# Altium PCB Lane_Detection_using_Sobel_Filter_Layout_Draft.PcbDoc
Units mil, origin at the board's own origin, x right, y up, seen from the top; angles counter-clockwise.
Board outline 6000 x 4000 mil, 2 copper layers (Top Layer, Bottom Layer); 9 components, 54 nets, 417 pads, 0 vias.
Unrouted connection lines stored in the file: 170.
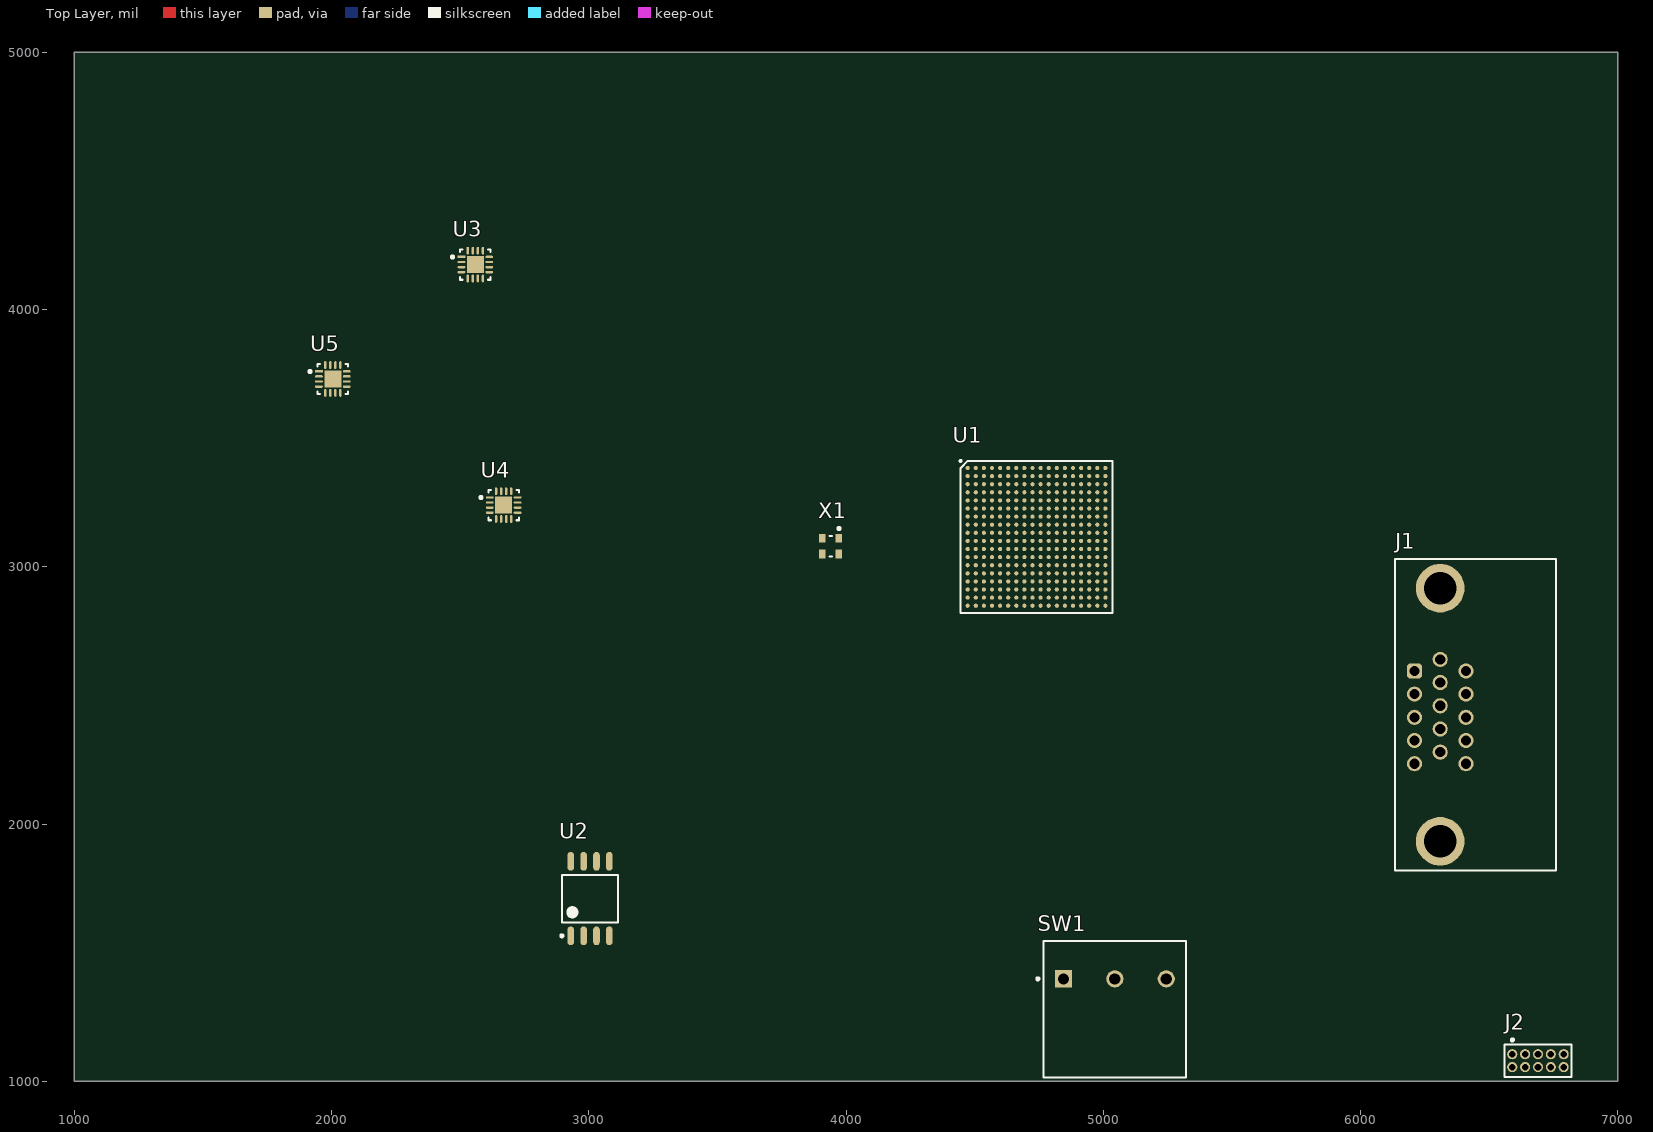
[diagram p0: Top Layer view]
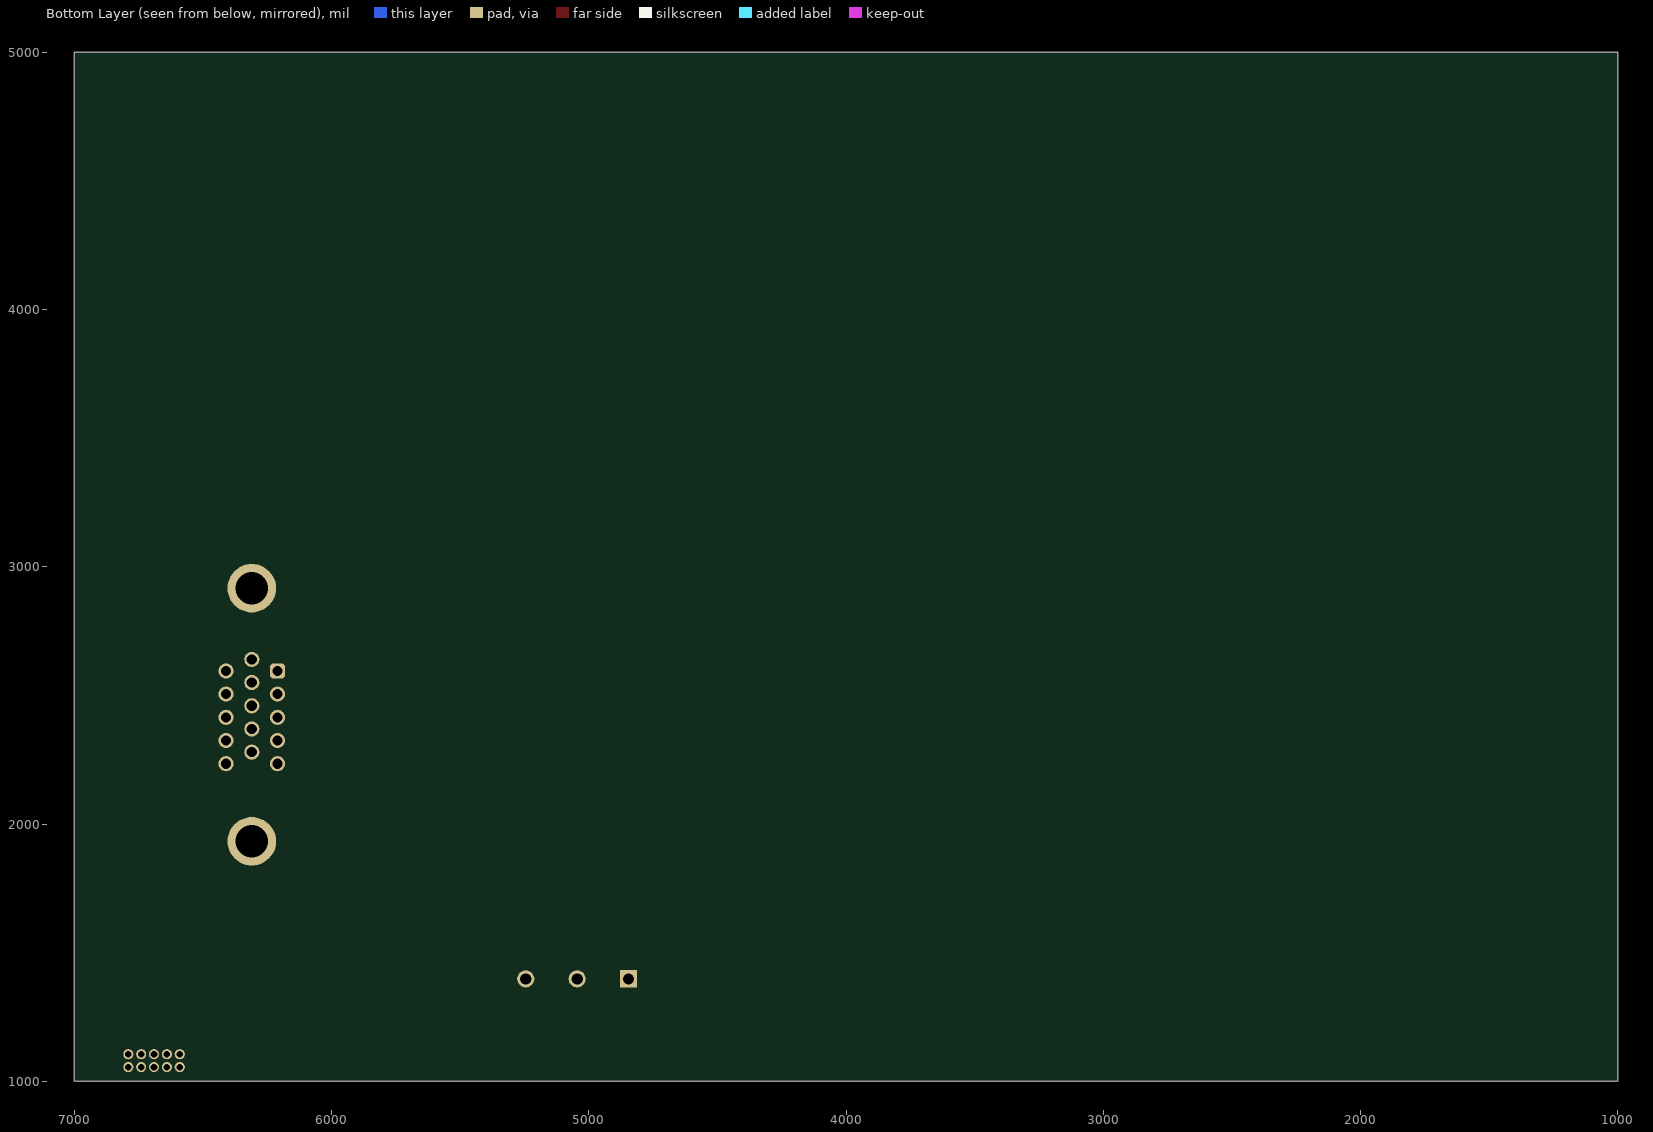
[diagram p1: Bottom Layer view, seen from below]

## Layer stack, top to bottom
Top Solder: solder mask 0.4, Solder Resist, Dk 3.5
Top Layer: signal copper 1.4
Dielectric 1: dielectric 12.6, FR-4, Dk 4.8
Bottom Layer: signal copper 1.4
Bottom Solder: solder mask 0.4, Solder Resist, Dk 3.5

## Board outline
1000,1000 7000,1000 7000,5000 1000,5000

## Design rules (kind name [scope] priority, off if disabled: settings)
Clearance [All] p1: gap=10 ignorepadtopadclearanceinfootprint=FALSE
PolygonConnect [All] p1: connectstyle=Relief reliefconductorwidth=10 reliefentries=4 polygonreliefangle="90 Angle" airgapwidth=10
RoutingVias [All] p1: holewidth=28 width=50 viastyle="Through Hole" minholewidth=28 minwidth=50 maxholewidth=28 maxwidth=50
SolderMaskExpansion [All] p1: expansion=4 istentingtop=FALSE
SupplyNets "Schematic Supply Nets" [InNet('GND')] p1: voltage=0.000
Width [All] p1: maxlimit=10 minlimit=10 preferedwidth=10
30 further rules are at their usual default settings.

## Components (designator, comment, footprint, x,y, rotation, side; value= is the part's Value field where it differs from the comment)
J1 "618015325223" 618015325223 6447.01,2424.68 r90 top
J2 "62201021821" 62201021821 6690,1080 r180 top
SW1 "25536NA6" FP-25536NA6-0 5045,1280 r0 top
U1 "XC7A100T-1CSG324C" BGA324C80P18X18_1500X1500X150 4740.75,3116.26 r0 top
U2 "MT25QL128ABA1ESE-0SIT" MICT-SE-8_M 3005,1710 r90 top
U3 "TPS62130ARGTR" FP-RGT0016C-IPC_C 2559.06,4174.84 r0 top
U4 "TPS62130ARGTR" FP-RGT0016C-IPC_C 2669.06,3239.84 r0 top
U5 "TPS62130ARGTR" FP-RGT0016C-IPC_C 2005,3730 r0 top
X1 "DSC1001DL5-100.0000T" FP-CDFN2520-4LD-PL-1-MFG 3940,3080 r270 top

## Footprints (in the part's own frame and the unit in brackets; to place one, negate y for a bottom-side part, rotate by r counter-clockwise, add the part's x,y. Pads: shape width x height; smd on the part's side, far side on the other; paste and mask are expansions set on the pad)
62201021821 [mm] "Socket Header, Pitch 1.27 mm, THT, Vertical, dual row, 10p"
  round 1 hole 0.65: 1(2.54,-0.635) 2(2.54,0.635) 3(1.27,-0.635) 4(1.27,0.635) 5(0,-0.635) 6(0,0.635) 7(-1.27,-0.635) 8(-1.27,0.635) 9(-2.54,-0.635) 10(-2.54,0.635)
  silkscreen extent -3.32,-2.17 3.32,1.6, body extent -3.37,-1.5 3.38,1.5, height 4.55
618015325223 [mm] "15 pins, right angled with Rivet"
  rrect50% 1.5x1.5 hole 1: 1(4.326,6.02)
  round 1.5 hole 1: 2(2.036,6.02) 3(-0.254,6.02) 4(-2.544,6.02) 5(-4.834,6.02) 6(5.466,3.48) 7(3.176,3.48) 8(0.886,3.48) 9(-1.404,3.48) 10(-3.694,3.48) 11(4.326,0.94) 12(2.036,0.94) 13(-0.254,0.94) 14(-2.544,0.94) 15(-4.834,0.94)
  round 4.8 hole 3.2: M1(-12.495,3.48) M2(12.495,3.48)
  silkscreen extent -15.4,-7.95 15.4,7.95, body extent -15.4,-13.85 15.4,7.95, height 12.55
BGA324C80P18X18_1500X1500X150 [mm]
  round 0.41 smd: A1(-6.8,6.8) A2(-6,6.8) A3(-5.2,6.8) A4(-4.4,6.8) A5(-3.6,6.8) A6(-2.8,6.8) A7(-2,6.8) A8(-1.2,6.8) A9(-0.4,6.8) A10(0.4,6.8) A11(1.2,6.8) A12(2,6.8) A13(2.8,6.8) A14(3.6,6.8) A15(4.4,6.8) A16(5.2,6.8) A17(6,6.8) A18(6.8,6.8) B1(-6.8,6) B2(-6,6) B3(-5.2,6) B4(-4.4,6) B5(-3.6,6) B6(-2.8,6) B7(-2,6) B8(-1.2,6) B9(-0.4,6) B10(0.4,6) B11(1.2,6) B12(2,6) B13(2.8,6) B14(3.6,6) B15(4.4,6) B16(5.2,6) B17(6,6) B18(6.8,6) C1(-6.8,5.2) C2(-6,5.2) C3(-5.2,5.2) C4(-4.4,5.2) C5(-3.6,5.2) C6(-2.8,5.2) C7(-2,5.2) C8(-1.2,5.2) C9(-0.4,5.2) C10(0.4,5.2) C11(1.2,5.2) C12(2,5.2) C13(2.8,5.2) C14(3.6,5.2) C15(4.4,5.2) C16(5.2,5.2) C17(6,5.2) C18(6.8,5.2) D1(-6.8,4.4) D2(-6,4.4) D3(-5.2,4.4) D4(-4.4,4.4) D5(-3.6,4.4) D6(-2.8,4.4) D7(-2,4.4) D8(-1.2,4.4) D9(-0.4,4.4) D10(0.4,4.4) D11(1.2,4.4) D12(2,4.4) D13(2.8,4.4) D14(3.6,4.4) D15(4.4,4.4) D16(5.2,4.4) D17(6,4.4) D18(6.8,4.4) E1(-6.8,3.6) E2(-6,3.6) E3(-5.2,3.6) E4(-4.4,3.6) E5(-3.6,3.6) E6(-2.8,3.6) E7(-2,3.6) E8(-1.2,3.6) E9(-0.4,3.6) E10(0.4,3.6) E11(1.2,3.6) E12(2,3.6) E13(2.8,3.6) E14(3.6,3.6) E15(4.4,3.6) E16(5.2,3.6) E17(6,3.6) E18(6.8,3.6) F1(-6.8,2.8) F2(-6,2.8) F3(-5.2,2.8) F4(-4.4,2.8) F5(-3.6,2.8) F6(-2.8,2.8) F7(-2,2.8) F8(-1.2,2.8) F9(-0.4,2.8) F10(0.4,2.8) F11(1.2,2.8) F12(2,2.8) F13(2.8,2.8) F14(3.6,2.8) F15(4.4,2.8) F16(5.2,2.8) F17(6,2.8) F18(6.8,2.8) G1(-6.8,2) G2(-6,2) G3(-5.2,2) G4(-4.4,2) G5(-3.6,2) G6(-2.8,2) G7(-2,2) G8(-1.2,2) G9(-0.4,2) G10(0.4,2) G11(1.2,2) G12(2,2) G13(2.8,2) G14(3.6,2) G15(4.4,2) G16(5.2,2) G17(6,2) G18(6.8,2) H1(-6.8,1.2) H2(-6,1.2) H3(-5.2,1.2) H4(-4.4,1.2) H5(-3.6,1.2) H6(-2.8,1.2) H7(-2,1.2) H8(-1.2,1.2) H9(-0.4,1.2) H10(0.4,1.2) H11(1.2,1.2) H12(2,1.2) H13(2.8,1.2) H14(3.6,1.2) H15(4.4,1.2) H16(5.2,1.2) H17(6,1.2) H18(6.8,1.2) J1(-6.8,0.4) J2(-6,0.4) J3(-5.2,0.4) J4(-4.4,0.4) J5(-3.6,0.4) J6(-2.8,0.4) J7(-2,0.4) J8(-1.2,0.4) J9(-0.4,0.4) J10(0.4,0.4) J11(1.2,0.4) J12(2,0.4) J13(2.8,0.4) J14(3.6,0.4) J15(4.4,0.4) J16(5.2,0.4) J17(6,0.4) J18(6.8,0.4) K1(-6.8,-0.4) K2(-6,-0.4) K3(-5.2,-0.4) K4(-4.4,-0.4) K5(-3.6,-0.4) K6(-2.8,-0.4) K7(-2,-0.4) K8(-1.2,-0.4) K9(-0.4,-0.4) K10(0.4,-0.4) K11(1.2,-0.4) K12(2,-0.4) K13(2.8,-0.4) K14(3.6,-0.4) K15(4.4,-0.4) K16(5.2,-0.4) K17(6,-0.4) K18(6.8,-0.4) L1(-6.8,-1.2) L2(-6,-1.2) L3(-5.2,-1.2) L4(-4.4,-1.2) L5(-3.6,-1.2) L6(-2.8,-1.2) L7(-2,-1.2) L8(-1.2,-1.2) L9(-0.4,-1.2) L10(0.4,-1.2) L11(1.2,-1.2) L12(2,-1.2) L13(2.8,-1.2) L14(3.6,-1.2) L15(4.4,-1.2) L16(5.2,-1.2) L17(6,-1.2) L18(6.8,-1.2) M1(-6.8,-2) M2(-6,-2) M3(-5.2,-2) M4(-4.4,-2) M5(-3.6,-2) M6(-2.8,-2) M7(-2,-2) M8(-1.2,-2) M9(-0.4,-2) M10(0.4,-2) M11(1.2,-2) M12(2,-2) M13(2.8,-2) M14(3.6,-2) M15(4.4,-2) M16(5.2,-2) M17(6,-2) M18(6.8,-2) N1(-6.8,-2.8) N2(-6,-2.8) N3(-5.2,-2.8) N4(-4.4,-2.8) N5(-3.6,-2.8) N6(-2.8,-2.8) N7(-2,-2.8) N8(-1.2,-2.8) N9(-0.4,-2.8) N10(0.4,-2.8) N11(1.2,-2.8) N12(2,-2.8) N13(2.8,-2.8) N14(3.6,-2.8) N15(4.4,-2.8) N16(5.2,-2.8) N17(6,-2.8) N18(6.8,-2.8) P1(-6.8,-3.6) P2(-6,-3.6) P3(-5.2,-3.6) P4(-4.4,-3.6) P5(-3.6,-3.6) P6(-2.8,-3.6) P7(-2,-3.6) P8(-1.2,-3.6) P9(-0.4,-3.6) P10(0.4,-3.6) P11(1.2,-3.6) P12(2,-3.6) P13(2.8,-3.6) P14(3.6,-3.6) P15(4.4,-3.6) P16(5.2,-3.6) P17(6,-3.6) P18(6.8,-3.6) R1(-6.8,-4.4) R2(-6,-4.4) R3(-5.2,-4.4) R4(-4.4,-4.4) R5(-3.6,-4.4) R6(-2.8,-4.4) R7(-2,-4.4) R8(-1.2,-4.4) R9(-0.4,-4.4) R10(0.4,-4.4) R11(1.2,-4.4) R12(2,-4.4) R13(2.8,-4.4) R14(3.6,-4.4) R15(4.4,-4.4) R16(5.2,-4.4) R17(6,-4.4) R18(6.8,-4.4) T1(-6.8,-5.2) T2(-6,-5.2) T3(-5.2,-5.2) T4(-4.4,-5.2) T5(-3.6,-5.2) T6(-2.8,-5.2) T7(-2,-5.2) T8(-1.2,-5.2) T9(-0.4,-5.2) T10(0.4,-5.2) T11(1.2,-5.2) T12(2,-5.2) T13(2.8,-5.2) T14(3.6,-5.2) T15(4.4,-5.2) T16(5.2,-5.2) T17(6,-5.2) T18(6.8,-5.2) U1(-6.8,-6) U2(-6,-6) U3(-5.2,-6) U4(-4.4,-6) U5(-3.6,-6) U6(-2.8,-6) U7(-2,-6) U8(-1.2,-6) U9(-0.4,-6) U10(0.4,-6) U11(1.2,-6) U12(2,-6) U13(2.8,-6) U14(3.6,-6) U15(4.4,-6) U16(5.2,-6) U17(6,-6) U18(6.8,-6) V1(-6.8,-6.8) V2(-6,-6.8) V3(-5.2,-6.8) V4(-4.4,-6.8) V5(-3.6,-6.8) V6(-2.8,-6.8) V7(-2,-6.8) V8(-1.2,-6.8) V9(-0.4,-6.8) V10(0.4,-6.8) V11(1.2,-6.8) V12(2,-6.8) V13(2.8,-6.8) V14(3.6,-6.8) V15(4.4,-6.8) V16(5.2,-6.8) V17(6,-6.8) V18(6.8,-6.8)
  silkscreen extent -7.6,-7.5 7.5,7.6
FP-25536NA6-0 [mm]
  rect 1.7x1.7 hole 1.1 paste-2539.97 mask+0: 1(-5.08,3)
  round 1.7 hole 1.1 paste-2539.97 mask+0: 2(0,3) 3(5.08,3)
  silkscreen extent -7.72,-6.75 7.05,6.75, body extent -7.15,-6.85 7.15,6.85, height 0.25
FP-CDFN2520-4LD-PL-1-MFG [mm]
  rect 0.85x0.65 smd paste+0 mask+0: 1(-0.775,0.825) 2(-0.775,-0.825) 3(0.775,-0.825) 4(0.775,0.825)
  silkscreen extent -1.87,-0.13 1.02,0.95, body extent -1.3,-1.38 1.3,1.38, height 0.25
FP-RGT0016C-IPC_C [mm]
  rect 0.766x0.239 smd paste+0 mask+0: 1(-1.373,0.75)
  rrect100% 0.766x0.239 smd paste+0 mask+0: 2(-1.373,0.25) 3(-1.373,-0.25) 4(-1.373,-0.75) 9(1.373,-0.75) 10(1.373,-0.25) 11(1.373,0.25) 12(1.373,0.75)
  rrect100% 0.239x0.766 smd paste+0 mask+0: 5(-0.75,-1.373) 6(-0.25,-1.373) 7(0.25,-1.373) 8(0.75,-1.373) 13(0.75,1.373) 14(0.25,1.373) 15(-0.25,1.373) 16(-0.75,1.373)
  rect 1.68x1.68 smd paste-1000 mask+0: 17(0,0)
  silkscreen extent -2.37,-1.5 1.5,1.5, body extent -1.86,-1.86 1.86,1.86, height 0.25
MICT-SE-8_M [mm] "SOP, 8-Leads, Body 5.5x5.5mm, Pitch 1.27mm, IPC Low Density"
  oval 1.85x0.65 smd: 1(-3.675,1.905) 2(-3.675,0.635) 3(-3.675,-0.635) 4(-3.675,-1.905) 5(3.675,-1.905) 6(3.675,-0.635) 7(3.675,0.635) 8(3.675,1.905)
  silkscreen extent -3.8,-2.75 2.35,2.9, body extent -3.95,-2.75 3.95,2.75, height 2.16

## Part data
J1: library part CMP-002-00072-1, "D-sub, Female High Density Angled Pcb Connector Without Hex Screw, 15 Pins", Max Operating Temperature=105°C, Min Operating Temperature=-55°C, Gender=Female, Pins=15
J2: library part CMP-002-00073-1, "Connector Header Surface Mount 10 position 0.050\" (1.27mm)-JTAG Connector", Max Operating Temperature=105°C, Min Operating Temperature=-40°C, Gender=Female, Pins=10
SW1: library part CMP-011-00013-1, "Switch Slide ON ON SPDT Side Slide 1A 30VDC 20000Cycles PC Pins Thru-Hole", Current Rating=1A, Max Current Rating=3A, Max Operating Temperature=85°C, Min Operating Temperature=-40°C, Mounting Technology="Through Hole", Throw Configuration=SPDT
U1: "IC FPGA ARTIX7 210 I/O 324CSBGA", Manufacturer_Name=AMD, Mouser Part Number=217-C7A100T-1CSG324C, Datasheet Link=http://www.xilinx.com/support/documentation/data_sheets/ds181_Artix_7_Data_Sheet.pdf, Geometry.Height=1.5mm, Manufacturer_Part_Number=XC7A100T-1CSG324C, Mouser Price/Stock=https://www.mouser.co.uk/ProductDetail/Xilinx/XC7A100T-1CSG324C?qs=rrS6PyfT74d56mzbBO3UMQ%3D%3D
U2: library part CMP-019-00049-1, "3.6 V 35 mA 128 Mbit 133 MHz Surface Mount FLASH - NOR Memory IC - SOIC-16", Case/Package=SOP, Clock Frequency=133MHz, Max Operating Temperature=85°C, Max Supply Voltage=3.6V, Min Operating Temperature=-40°C, Min Supply Voltage=2.7V, Memory Format=FLASH, Memory Size=16MB
U3 U4 U5: library part CMP-019-00050-1, "3-V to 17-V, 3-A step-down converter with DCS-control in 3x3 QFN package 16-VQFN -40 to 125", Case/Package=VQFN, Max Operating Temperature=125°C, Max Supply Voltage=17V, Min Operating Temperature=-40°C, Min Supply Voltage=3V, Nominal Supply Current=17µA, Output Current=3A, Output Voltage=6V, Mounting Technology="Surface Mount", Pins=16
X1: library part CMP-00023-00003-1, "3.3 V 100 MHz Surface Mount Low-Power Precision CMOS Oscillator - VDFN-4", Case/Package=SMD/SMT, Frequency=100MHz, Max Operating Temperature=105°C, Min Operating Temperature=-40°C, Mounting Technology="Standard, Surface Mount", Pins=4

## Nets (pads, with @x,y where several pads share a name; then routed paths per layer and width w, separated by ;. In a path a pad name is that pad's centre, name@x,y a point inside that pad or via, vN(x,y) a via of type N, cw(c..) or ccw(c..) an arc to the next point about the centre after c; other vN are vias at no path point)
CLK100MHZ: U1.P17 X1.3
GND: J1.4 J1.5 J1.6 J1.7 J1.8 J1.9 J1.10 J1.11 J1.12 J1.15 J1.M1 J1.M2 J2.2 J2.4 J2.6 J2.8 J2.10 SW1.3 U1.A2 U1.A12 U1.B5 U1.B15 U1.C8 U1.C18 U1.D1 U1.D11 U1.E4 U1.E8 U1.E14 U1.F7 U1.F9 U1.F11 U1.F17 U1.G8 U1.G10 U1.G12 U1.H3 U1.H7 U1.H9 U1.H11 U1.H13 U1.J6 U1.J8 U1.J10 U1.J12 U1.J16 U1.K7 U1.K9 U1.K11 U1.L2 U1.L8 U1.L12 U1.M5 U1.M7 U1.M9 U1.M11 U1.M15 U1.N8 U1.N10 U1.N12 U1.N18 U1.P1 U1.R4 U1.R14 U1.T7 U1.T17 U1.U10 U1.V3 U1.V13 U2.4 U3.6 U3.7 U3.8 U3.15 U3.16 U3.17 U4.6 U4.7 U4.8 U4.15 U4.16 U4.17 U5.6 U5.7 U5.8 U5.15 U5.16 U5.17 X1.2
HSYNC: U1.H16
NetR19_1: U1.P12
NetR20_1: U1.P13
NetR21_1: U1.P11
NetR22_1: U1.P9
NetR23_1: U1.P7
NetR24_1: U1.P10
QSPI_CCLK: U1.E9 U2.6
QSPI_CS_B: U1.L13 U2.1
QSPI_DQ0: U1.K17 U2.5
QSPI_DQ1: U1.K18 U2.2
QSPI_DQ2: U1.L14 U2.3
QSPI_DQ3: U1.M14 U2.7
SW0: SW1.2 U1.F15
TCK: J2.3 U1.E10
TDI: J2.7 U1.E11
TDO: J2.5 U1.E13
TMS: J2.9 U1.E12
VCCAUX_1V8: U1.F12 U1.H10 U1.H12 U1.K12 U1.M12 U4.14
VCCAUX_FB: U4.5
VCCAUX_PG: U4.4
VCCAUX_SS: U4.9
VCCAUX_SW: U4.1 U4.2 U4.3
VCCINT_1V0: U1.F8 U1.F10 U1.G7 U1.G9 U1.G11 U1.H8 U1.J7 U1.J11 U1.K8 U1.L7 U1.L11 U1.M8 U1.M10 U1.N7 U1.N9 U1.N11 U3.14
VCCINT_FB: U3.5
VCCINT_PG: U3.4
VCCINT_SS: U3.9
VCCINT_SW: U3.1 U3.2 U3.3
VCCO_3V3: J2.1 SW1.1 U1.A7 U1.A17 U1.B10 U1.C3 U1.C13 U1.D6 U1.D16 U1.F2 U1.G5 U1.G15 U1.H18 U1.J1 U1.K4 U1.K14 U1.L17 U1.N3 U1.N13 U1.P6 U1.P8 U1.P16 U1.R9 U1.T2 U1.T12 U1.U5 U1.U15 U1.V8 U1.V18 U2.8 U5.14 X1.1 X1.4
VCCO_FB: U5.5
VCCO_PG: U5.4
VCCO_SS: U5.9
VCCO_SW: U5.1 U5.2 U5.3
VGA_B0: U1.E15
VGA_B1: U1.C15
VGA_B2: U1.D15
VGA_B3: U1.G16
VGA_B_ANALOG: J1.3
VGA_G0: U1.E18
VGA_G1: U1.G13
VGA_G2: U1.K16
VGA_G3: U1.E16
VGA_G_ANALOG: J1.2
VGA_HSYNC: J1.13
VGA_R0: U1.A11
VGA_R1: U1.B11
VGA_R2: U1.D12
VGA_R3: U1.H14
VGA_R_ANALOG: J1.1
VGA_VSYNC: J1.14
VIN: U3.10 U3.11 U3.12 U3.13 U4.10 U4.11 U4.12 U4.13 U5.10 U5.11 U5.12 U5.13
VSYNC: U1.F16
pads on no net: U1.A1 U1.A3 U1.A4 U1.A5 U1.A6 U1.A8 U1.A9 U1.A10 U1.A13 U1.A14 U1.A15 U1.A16 U1.A18 U1.B1 U1.B2 U1.B3 U1.B4 U1.B6 U1.B7 U1.B8 U1.B9 U1.B12 U1.B13 U1.B14 U1.B16 U1.B17 U1.B18 U1.C1 U1.C2 U1.C4 U1.C5 U1.C6 U1.C7 U1.C9 U1.C10 U1.C11 U1.C12 U1.C14 U1.C16 U1.C17 U1.D2 U1.D3 U1.D4 U1.D5 U1.D7 U1.D8 U1.D9 U1.D10 U1.D13 U1.D14 U1.D17 U1.D18 U1.E1 U1.E2 U1.E3 U1.E5 U1.E6 U1.E7 U1.E17 U1.F1 U1.F3 U1.F4 U1.F5 U1.F6 U1.F13 U1.F14 U1.F18 U1.G1 U1.G2 U1.G3 U1.G4 U1.G6 U1.G14 U1.G17 U1.G18 U1.H1 U1.H2 U1.H4 U1.H5 U1.H6 U1.H15 U1.H17 U1.J2 U1.J3 U1.J4 U1.J5 U1.J9 U1.J13 U1.J14 U1.J15 U1.J17 U1.J18 U1.K1 U1.K2 U1.K3 U1.K5 U1.K6 U1.K10 U1.K13 U1.K15 U1.L1 U1.L3 U1.L4 U1.L5 U1.L6 U1.L9 U1.L10 U1.L15 U1.L16 U1.L18 U1.M1 U1.M2 U1.M3 U1.M4 U1.M6 U1.M13 U1.M16 U1.M17 U1.M18 U1.N1 U1.N2 U1.N4 U1.N5 U1.N6 U1.N14 U1.N15 U1.N16 U1.N17 U1.P2 U1.P3 U1.P4 U1.P5 U1.P14 U1.P15 U1.P18 U1.R1 U1.R2 U1.R3 U1.R5 U1.R6 U1.R7 U1.R8 U1.R10 U1.R11 U1.R12 U1.R13 U1.R15 U1.R16 U1.R17 U1.R18 U1.T1 U1.T3 U1.T4 U1.T5 U1.T6 U1.T8 U1.T9 U1.T10 U1.T11 U1.T13 U1.T14 U1.T15 U1.T16 U1.T18 U1.U1 U1.U2 U1.U3 U1.U4 U1.U6 U1.U7 U1.U8 U1.U9 U1.U11 U1.U12 U1.U13 U1.U14 U1.U16 U1.U17 U1.U18 U1.V1 U1.V2 U1.V4 U1.V5 U1.V6 U1.V7 U1.V9 U1.V10 U1.V11 U1.V12 U1.V14 U1.V15 U1.V16 U1.V17

## Text inside footprints (layer, text, board x,y; h text height)
J1: Assembly Notes "PCB Edge" at 6824.96,2322.32 h40 r90